# Altium PCB BUCK CONVERTER PCB.PcbDoc
Units mm, origin at the board's own origin, x right, y up, seen from the top; angles counter-clockwise.
Board outline 47.96 x 37.79 mm, 2 copper layers (Top Layer, Bottom Layer); 12 components, 5 nets, 32 pads, 13 vias.
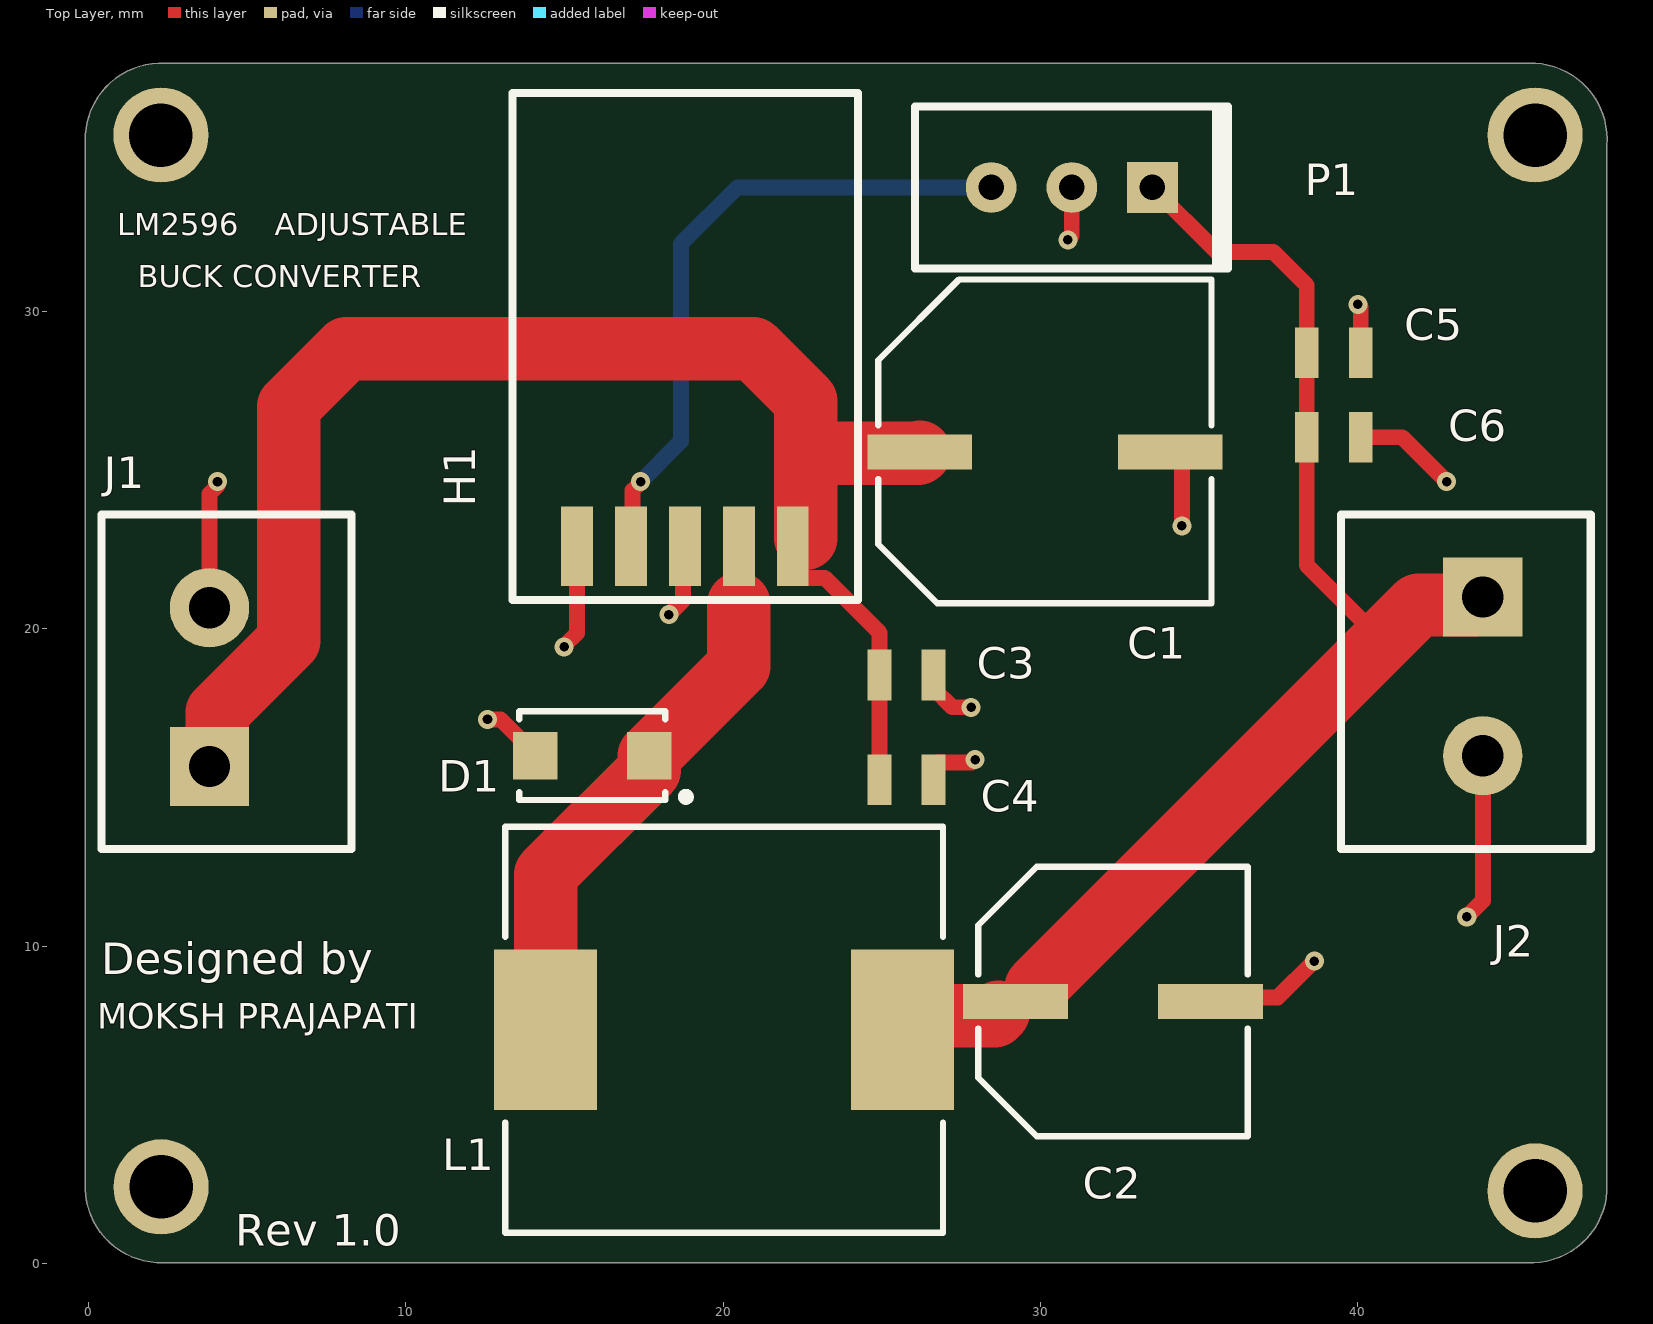
[diagram p0: Top Layer view]
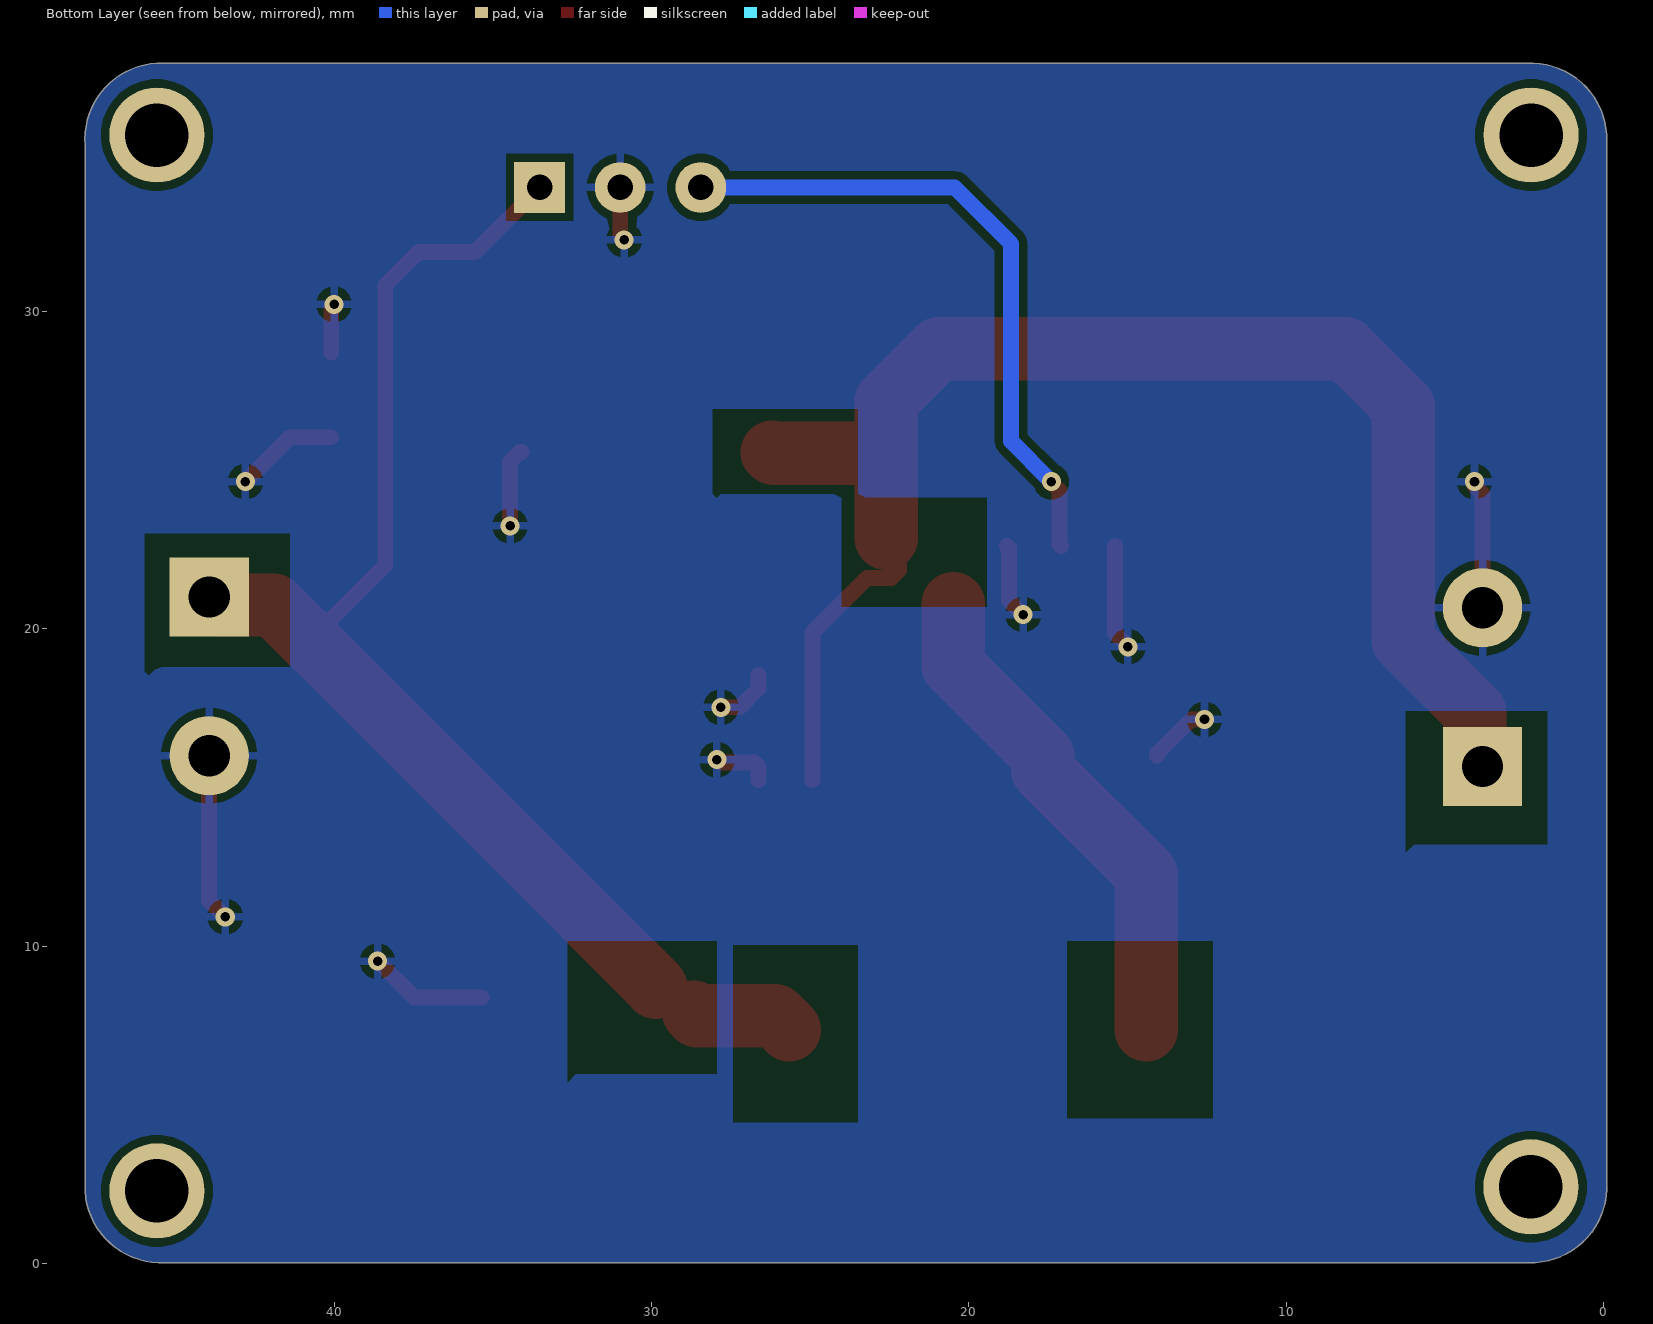
[diagram p1: Bottom Layer view, seen from below]
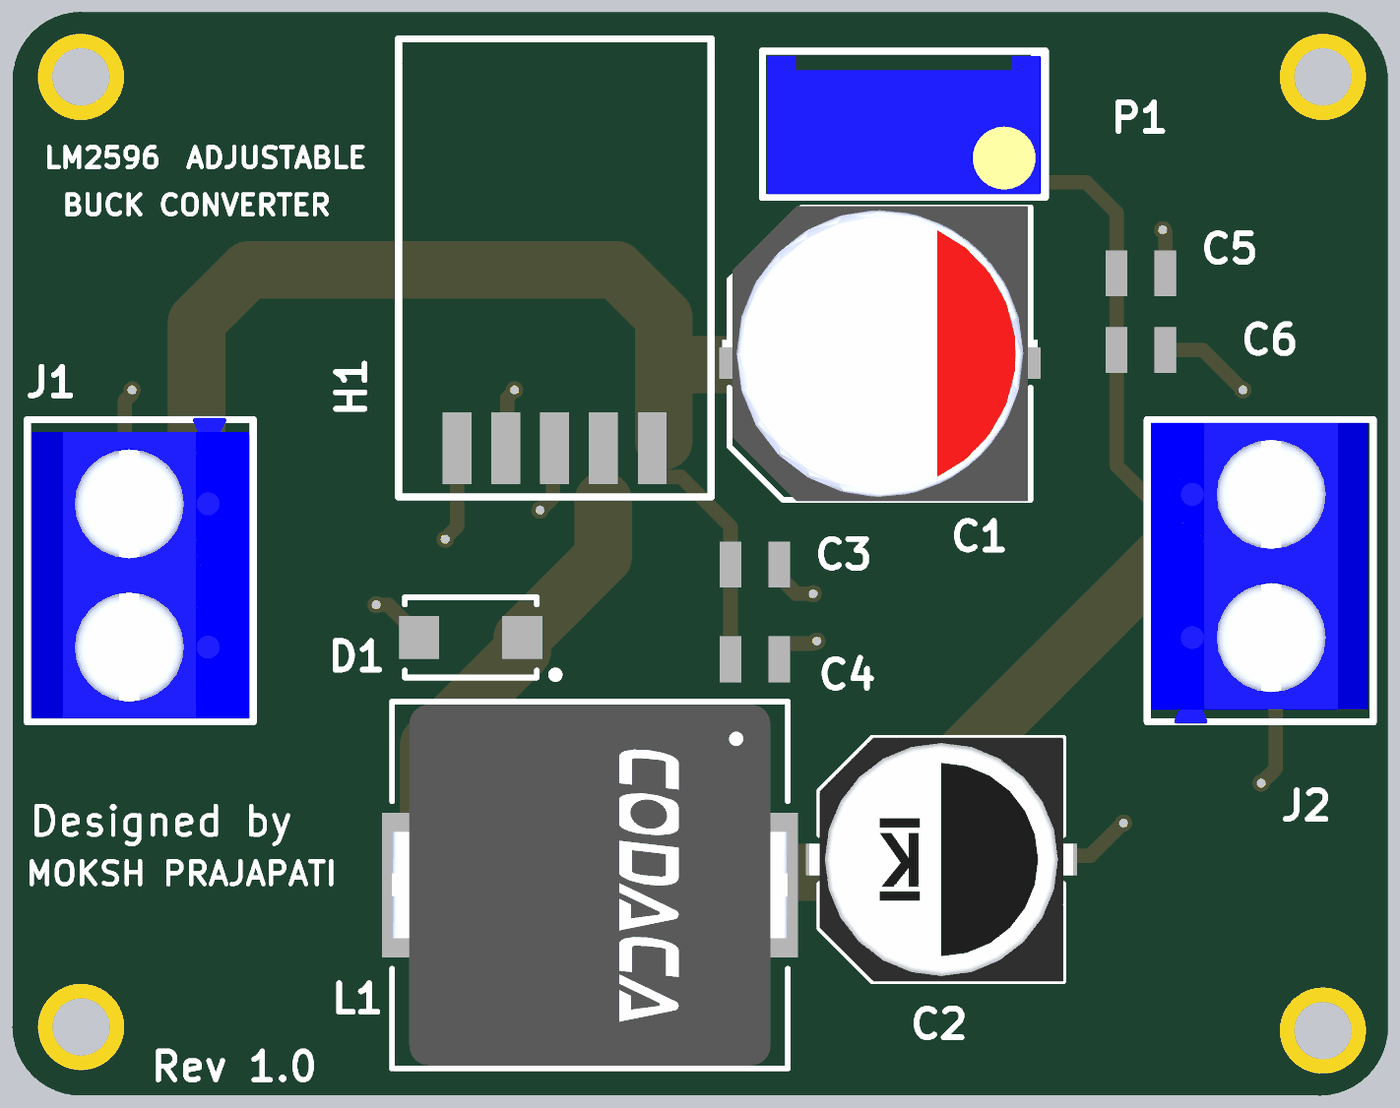
[diagram p2: 3D render of the assembled board from above, using the file's embedded part models]

## Layer stack, top to bottom
Top Solder: solder mask 0.0102, Solder Resist, Dk 3.5
Top Layer: signal copper 0.0356
Dielectric 1: dielectric 0.32, FR-4, Dk 4.8
Bottom Layer: signal copper 0.0356
Bottom Solder: solder mask 0.0102, Solder Resist, Dk 3.5

## Board outline
-0.1,2.543 ccw(c2.286,2.413) 2.153,0.027 2.159,0.027 45.336,0.027 ccw(c45.466,2.413) 47.852,2.28 47.852,2.286 47.852,35.303 ccw(c45.466,35.433) 47.856,35.433 ccw(c45.466,35.433) 45.599,37.819 45.593,37.819 2.416,37.819 ccw(c2.286,35.433) -0.1,35.566 -0.1,35.56

## Design rules (kind name [scope] priority, off if disabled: settings)
Clearance [All] p1: gap=0.254 ignorepadtopadclearanceinfootprint=FALSE
PolygonConnect [All] p1: connectstyle=Relief reliefconductorwidth=0.254 reliefentries=4 polygonreliefangle="90 Angle" airgapwidth=0.254
RoutingVias [All] p1: holewidth=0.3 width=0.6 viastyle="Through Hole" minholewidth=0.3 minwidth=0.6 maxholewidth=0.3 maxwidth=0.6
SilkToSilkClearance [All] p1: silktosilkclearance=0.1
SilkToSolderMaskClearance [IsPad] p1: minsilkscreentomaskgap=0.1 clearancetoexposedcopper=TRUE
SolderMaskExpansion [All] p1: expansion=0 istentingtop=FALSE
SupplyNets "Schematic Supply Nets_1" [InNet('VOUT')] p1: voltage=0.000
SupplyNets "Schematic Supply Nets_2" [InNet('VIN')] p2: voltage=0.000
SupplyNets "Schematic Supply Nets" [InNet('GND')] p3: voltage=0.000
Width [All] p1: maxlimit=2 minlimit=0.3 preferedwidth=0.5
28 further rules are at their usual default settings.

## Components (designator, comment, footprint, x,y, rotation, side; value= is the part's Value field where it differs from the comment)
C1 "100uF" "ELECTROLYTIC CAPACITOR" 29.972,25.908 r0 top
C2 "220uF" ELECROLITIC 32.285,8.255 r0 top
C3 "100nF" CAPACITOR0805 25.781,18.542 r0 top
C4 "1uF" CAPACITOR0805 25.781,15.24 r0 top
C5 "100nF" CAPACITOR0805 39.243,28.702 r0 top
C6 "1uF" CAPACITOR0805 39.243,26.035 r0 top
D1 "SS54" "SCHKOOTY DIODE" 15.875,16.002 r180 top
H1 "LM2596" TO263-5L 22.196,22.606 r270 top
J1 "1X2 HEADER" "CONNECTOR BLOCK2PIN" 3.81,18.161 r180 top
J2 "1X2 HEADER" "CONNECTOR BLOCK2PIN" 43.942,18.5 r0 top
L1 "47uH" INDUCTOR 20.029,7.366 r0 top
P1 "10K" POTENTIOMETER 30.988,33.909 r270 top

## Footprints (in the part's own frame and the unit in brackets; to place one, negate y for a bottom-side part, rotate by r counter-clockwise, add the part's x,y. Pads: shape width x height; smd on the part's side, far side on the other; paste and mask are expansions set on the pad)
CAPACITOR0805 [mm]
  rect 0.75x1.6 smd: 1(-0.85,0) 2(0.85,0)
  body extent -1.15,-0.77 1.15,0.77, height 0.6
"CONNECTOR BLOCK2PIN" [mm] "terminalbox 2pin"
  rect 2.5x2.5 hole 1.3 mask-2539.97: 1(0,2.5)
  round 2.5 hole 1.3 mask-2539.97: 2(0,-2.5)
  silkscreen extent -4.47,-5.44 3.4,5.1, body extent -4.36,-5.5 3.24,5, height 3.2
ELECROLITIC [mm] "A768KS227M1VLAE024"
  rect 3.3x1.1 smd: 1(-3.075,0) 2(3.075,0)
  silkscreen extent -4.25,-4.25 4.25,4.25, body extent -4.6,-4.25 4.6,4.25
"ELECTROLYTIC CAPACITOR" [mm] "A768MS107M1HLAE024.....100uF 50V Capacitor"
  rect 3.3x1.1 smd: 1(-3.78,-0.34) 2(4.12,-0.34)
  silkscreen extent -5.08,-5.1 5.42,5.1, body extent -5.33,-5.15 5.67,5.15
INDUCTOR [mm]
  rect 3.25x5.05 smd: 1(-5.625,0) 2(5.625,0)
  silkscreen extent -6.9,-6.4 6.9,6.4, body extent -6.9,-6.3 6.9,6.3
POTENTIOMETER [mm] "3PIN...3296W-1-103RLF"
  rect 1.6x1.6 hole 0.8 mask-2539.97: 1(0,2.54)
  round 1.6 hole 0.8 mask-2539.97: 2(0,0) 3(0,-2.54)
  silkscreen extent -2.55,-4.94 2.55,4.92, body extent -2.38,-4.77 2.45,4.76, height 6.72
"SCHKOOTY DIODE" [mm] "SMA/DO-214AC"
  rect 1.4x1.5 smd: 1(-1.8,0) 2(1.8,0)
  silkscreen extent -3.08,-1.4 2.3,1.42, body extent -2.3,-1.4 2.3,1.4, height 2.62
TO263-5L [mm] "LM2596S-ADJ-EV"
  rect 2.5x1 smd: 1(0,0) 2(0,-1.7) 3(0,-3.4) 4(0,-5.1) 5(0,-6.8)
  silkscreen extent -14.28,-8.84 1.7,2.06

## Part data
C1 C2: library part CAPACITOR, "POLERIZED"
C3 C4 C5 C6: library part CAPACITOR.., "UNPOLERIZED"
D1: library part "Schottky Diode"
H1: "TO263-5L"
J1 J2: library part "terminalblock 2 pin", Color=White, Contact Resistance=10mΩ, Current Rating=4A, Dielectric Material=Polyamide, Flammability Rating="UL94 V-0", Housing Color=Natural, Insulation Resistance=1GΩ, Manufacturer=Molex, Manufacturer Lifecycle Status=ACTIVE, Manufacturer Part Number=22-27-2021, Max Operating Temperature=75°C, Min Operating Temperature=0°C, Ratings=CSA, Supplier Part Number=WM4111-ND, Voltage Rating=500V, Voltage Rating (AC)=250V, Approvals="CSA, UL", Category="Headers and Wire Housings", China RoHS=Compliant, ComponentLink1Description=https://datasheet.octopart.com:443/22-27-2021-Molex-datasheet-81843831.pdf?src-supplier=Upverter, ComponentLink1URL=https://datasheet.octopart.com:443/22-27-2021-Molex-datasheet-81843831.pdf?src-supplier=Upverter, ComponentLink2Description=https://datasheet.octopart.com:443/22-27-2021-Molex-datasheet-10979409.pdf?src-supplier=Molex, ComponentLink2URL=https://datasheet.octopart.com:443/22-27-2021-Molex-datasheet-10979409.pdf?src-supplier=Molex, ComponentLink3Description=https://datasheet.octopart.com:443/02227-2021-Molex-datasheet-13784872.pdf?src-supplier=Molex, ComponentLink3URL=https://datasheet.octopart.com:443/02227-2021-Molex-datasheet-13784872.pdf?src-supplier=Molex, ComponentLink4Description=https://datasheet.octopart.com:443/22-27-2021-Molex-datasheet-5315839.pdf?src-supplier=Future+Electronics, ComponentLink4URL=https://datasheet.octopart.com:443/22-27-2021-Molex-datasheet-5315839.pdf?src-supplier=Future+Electronics, ComponentLink5Description=https://datasheet.octopart.com:443/22272021-Molex-datasheet-137316104.pdf?src-supplier=Future+Electronics, ComponentLink5URL=https://datasheet.octopart.com:443/22272021-Molex-datasheet-137316104.pdf?src-supplier=Future+Electronics, ComponentLink6Description=https://datasheet.octopart.com:443/22-27-2021-Molex-datasheet-193085717.pdf?src-supplier=JRH+Electronics, ComponentLink6URL=https://datasheet.octopart.com:443/22-27-2021-Molex-datasheet-193085717.pdf?src-supplier=JRH+Electronics, ComponentLink7Description=https://datasheet.octopart.com:443/22-27-2021-Molex-datasheet-154747145.pdf?src-supplier=Master+Electronics, ComponentLink7URL=https://datasheet.octopart.com:443/22-27-2021-Molex-datasheet-154747145.pdf?src-supplier=Master+Electronics, ComponentLink8Description=https://datasheet.octopart.com:443/22-27-2021-Molex-datasheet-101581847.pdf?src-supplier=Farnell, ComponentLink8URL=https://datasheet.octopart.com:443/22-27-2021-Molex-datasheet-101581847.pdf?src-supplier=Farnell, ComponentLink9Description=https://datasheet.octopart.com:443/02227-2021-Molex-datasheet-14711101.pdf?src-supplier=Farnell, ComponentLink9URL=https://datasheet.octopart.com:443/02227-2021-Molex-datasheet-14711101.pdf?src-supplier=Farnell, ComponentLink10Description=https://datasheet.octopart.com:443/22-27-2021-Molex-datasheet-506551.pdf?src-supplier=Farnell, ComponentLink10URL=https://datasheet.octopart.com:443/22-27-2021-Molex-datasheet-506551.pdf?src-supplier=Farnell, ComponentLink11Description=https://datasheet.octopart.com:443/22-27-2021-Molex-datasheet-21538535.pdf?src-supplier=Newark, ComponentLink11URL=https://datasheet.octopart.com:443/22-27-2021-Molex-datasheet-21538535.pdf?src-supplier=Newark, ComponentLink12Description=https://datasheet.octopart.com:443/22-27-2021-Molex-datasheet-38329585.pdf?src-supplier=Newark, ComponentLink12URL=https://datasheet.octopart.com:443/22-27-2021-Molex-datasheet-38329585.pdf?src-supplier=Newark, ComponentLink13Description=https://datasheet.octopart.com:443/22-27-2021-Molex-datasheet-33021744.pdf?src-supplier=Newark, ComponentLink13URL=https://datasheet.octopart.com:443/22-27-2021-Molex-datasheet-33021744.pdf?src-supplier=Newark, ComponentLink14Description=https://datasheet.octopart.com:443/22-27-2021-Molex-datasheet-33002331.pdf?src-supplier=Newark, ComponentLink14URL=https://datasheet.octopart.com:443/22-27-2021-Molex-datasheet-33002331.pdf?src-supplier=Newark, ComponentLink15Description=https://datasheet.octopart.com:443/02227-2021-Molex-datasheet-21206939.pdf?src-supplier=Newark, ComponentLink15URL=https://datasheet.octopart.com:443/02227-2021-Molex-datasheet-21206939.pdf?src-supplier=Newark, ComponentLink16Description=https://datasheet.octopart.com:443/22-27-2021-Molex-datasheet-604178.pdf?src-supplier=element14+APAC, ComponentLink16URL=https://datasheet.octopart.com:443/22-27-2021-Molex-datasheet-604178.pdf?src-supplier=element14+APAC, ComponentLink17Description=https://datasheet.octopart.com:443/0022272021-Molex-datasheet-164461543.pdf?src-supplier=Sager+Electronics, ComponentLink17URL=https://datasheet.octopart.com:443/0022272021-Molex-datasheet-164461543.pdf?src-supplier=Sager+Electronics, ComponentLink18Description=https://datasheet.octopart.com:443/22-27-2021-Molex-datasheet-158567618.pdf?src-supplier=RS+(Formerly+Allied+Electronics), ComponentLink18URL=https://datasheet.octopart.com:443/22-27-2021-Molex-datasheet-158567618.pdf?src-supplier=RS+(Formerly+Allied+Electronics), ComponentLink19Description=https://datasheet.octopart.com:443/22-27-2021-Molex-datasheet-140181058.pdf?src-supplier=RS+(Formerly+Allied+Electronics), ComponentLink19URL=https://datasheet.octopart.com:443/22-27-2021-Molex-datasheet-140181058.pdf?src-supplier=RS+(Formerly+Allied+Electronics), ComponentLink20Description=https://datasheet.octopart.com:443/22-27-2021-Molex-datasheet-120145351.pdf?src-supplier=RS+(Formerly+Allied+Electronics), ComponentLink20URL=https://datasheet.octopart.com:443/22-27-2021-Molex-datasheet-120145351.pdf?src-supplier=RS+(Formerly+Allied+Electronics), ComponentLink21Description=https://datasheet.octopart.com:443/22-27-2021-Molex-datasheet-9995492.pdf?src-supplier=RS+(Formerly+Allied+Electronics), ComponentLink21URL=https://datasheet.octopart.com:443/22-27-2021-Molex-datasheet-9995492.pdf?src-supplier=RS+(Formerly+Allied+Electronics), ComponentLink22Description=https://datasheet.octopart.com:443/22-27-2021-Molex-datasheet-155977274.pdf?src-supplier=SOS+electronic, ComponentLink22URL=https://datasheet.octopart.com:443/22-27-2021-Molex-datasheet-155977274.pdf?src-supplier=SOS+electronic, ComponentLink23Description=https://datasheet.octopart.com:443/22-27-2021-Molex-datasheet-62103479.pdf?src-supplier=Electro+Sonic, ComponentLink23URL=https://datasheet.octopart.com:443/22-27-2021-Molex-datasheet-62103479.pdf?src-supplier=Electro+Sonic, ComponentLink24Description=https://datasheet.octopart.com:443/22-27-2021-Molex-datasheet-37168867.pdf?src-supplier=Electro+Sonic, ComponentLink24URL=https://datasheet.octopart.com:443/22-27-2021-Molex-datasheet-37168867.pdf?src-supplier=Electro+Sonic, ComponentLink25Description=https://datasheet.octopart.com:443/22-27-2021-Molex-datasheet-151821780.pdf?src-supplier=Toby+Electronics, ComponentLink25URL=https://datasheet.octopart.com:443/22-27-2021-Molex-datasheet-151821780.pdf?src-supplier=Toby+Electronics, ComponentLink26Description=https://datasheet.octopart.com:443/22-27-2021-Molex-datasheet-124775.pdf?src-supplier=DigiKey, ComponentLink26URL=https://datasheet.octopart.com:443/22-27-2021-Molex-datasheet-124775.pdf?src-supplier=DigiKey, ComponentLink27Description=https://datasheet.octopart.com:443/22-27-2021-Molex-datasheet-7627818.pdf?src-supplier=Jameco, ComponentLink27URL=https://datasheet.octopart.com:443/22-27-2021-Molex-datasheet-7627818.pdf?src-supplier=Jameco, ComponentLink28Description=https://datasheet.octopart.com:443/22-27-2021-Molex-datasheet-17586671.pdf?src-supplier=TME, ComponentLink28URL=https://datasheet.octopart.com:443/22-27-2021-Molex-datasheet-17586671.pdf?src-supplier=TME, ComponentLink29Description=http://sigma.octopart.com:80/16297726/rohs_statement/Molex-02227-2021.pdf?src-supplier=Compliance+Statements, ComponentLink29URL=http://sigma.octopart.com:80/16297726/rohs_statement/Molex-02227-2021.pdf?src-supplier=Compliance+Statements, ComponentLink30Description=http://sigma.octopart.com:80/reach_statement/Molex-company-74.pdf?src-supplier=Compliance+Statements, ComponentLink30URL=http://sigma.octopart.com:80/reach_statement/Molex-company-74.pdf?src-supplier=Compliance+Statements, ComponentLink31Description=http://sigma.octopart.com:80/rohs_statement/Molex-company-73.pdf?src-supplier=Compliance+Statements, ComponentLink31URL=http://sigma.octopart.com:80/rohs_statement/Molex-company-73.pdf?src-supplier=Compliance+Statements, ComponentLink32Description=http://sigma.octopart.com:80/conflict_mineral_statement/Molex-company-72.pdf?src-supplier=Compliance+Statements, ComponentLink32URL=http://sigma.octopart.com:80/conflict_mineral_statement/Molex-company-72.pdf?src-supplier=Compliance+Statements, Contact Gender=Male, Contact Material=Brass, Contact Plating=Tin, Country of Origin=TH, Depth=5.8mm, Export Control Classification Number (ECCN) Code=EAR99, Gender=Male, Harmonized Tariff Schedule (HTS) Code=8536.69.40.40, Height=12.05mm, Housing Material=Nylon, Introduction Date=1994-12-01, Lead Free="Lead Free", Lead Pitch=2.54mm, Length=10.16mm, Lifecycle Status=Production, Material=Nylon, Max Current Rating=4A, Mounting Technology="Through Hole", Number of Circuits=2, Number of Contacts=2, Number of Positions=2, Number of Rows=1, Orientation=Vertical, Pins=2, Pitch=2.54mm, Plating=Tin, Plating Thickness=2.54µm, Pricing="1=0.21, 10=0.182, 100=0.1546, 500=0.13798, 2850=0.12202, 5700=0.11619, 11400=0.11065 (USD)", Radiation Hardening=No, REACH SVHC=Yes, RoHS=Compliant, Schedule B="8536694040, 8536694040|8536694040|8536694040|8536694040|8536694040|8536694040|8536694040|8536694040|8536694040|8536694040|8536694040|8536694040|8536694040|8536694040|8536694040|8536694040|8536694040|8536694040|8536694040|8536694040|8536694040|8536694040|8536694040|85", Stock=142263, Supplier=DigiKey, Terminal Pitch=2.54mm, Termination=Solder, Voltage Rating (DC)=250V, Working Voltage=250V
L1: library part INDUCTOR
P1: library part POTENTIOMETER

## Free pads (board coordinates)
  round 3 hole 2: 1(2.28,35.56) 1(2.286,2.413) 1(45.59,2.286) 1(45.59,35.56)

## Via types
v1: diameter 0.6, hole 0.3, Top Layer to Bottom Layer, tented both sides, 13 vias

## Nets (pads, with @x,y where several pads share a name; then routed paths per layer and width w, separated by ;. In a path a pad name is that pad's centre, name@x,y a point inside that pad or via, vN(x,y) a via of type N, cw(c..) or ccw(c..) an arc to the next point about the centre after c; other vN are vias at no path point)
GND: C1.2 C2.2 C3.2 C4.2 C5.2 C6.2 D1.2 H1.3 H1.5 J1.2 J2.2 P1.2 | length 32.2
  Top Layer w0.5: J1.2 3.81,24.257 v1@4.064,24.511 ; v1(12.573,17.145) 12.982,17.145 14.075,16.052 D1.2 ; v1(14.986,19.431) 14.986,19.458 15.396,19.868 H1.5 ; v1(18.288,20.447) 18.74,20.899 18.74,22.55 H1.3 ; C4.2 26.631,15.665 26.756,15.79 27.828,15.79 27.913,15.875 v1(27.94,15.875) ; C3.2 26.631,18.117 27.222,17.526 v1(27.813,17.526) ; v1(30.861,32.258) 30.988,32.385 P1.2 ; C1.2 34.159,25.568 34.459,25.268 v1(34.459,23.241) ; C2.2@35.36,8.382 37.476,8.382 38.619,9.525 v1(38.635,9.525) ; v1(40.005,30.226) 40.093,30.138 C5.2 ; C6.2 41.402,26.035 v1(42.799,24.638) ; v1(43.434,10.922) 43.942,11.43 43.942,14.732
  other v1: 4.064,24.638
NetD1_1: D1.1 H1.2 L1.1 | length 15.9
  Top Layer w2: L1.1 14.404,12.266 17.675,15.537 D1.1 20.496,18.823 20.496,20.783
NetH1_4: H1.4 P1.3 | length 20.7
  Top Layer w0.5: H1.4 17.145,22.655 17.145,24.357 17.399,24.611 v1(17.399,24.638)
  Bottom Layer w0.5: v1(17.399,24.638) 18.669,25.908 18.669,32.131 20.447,33.909 P1.3
VIN: C1.1 C3.1 C4.1 H1.1 J1.1 | length 47
  Top Layer w0.5: H1.1 22.196,21.856 22.446,21.606 23.196,21.606 24.931,19.871 C3.1 C4.1
  Top Layer w2: J1.1 4.06,15.911 4.06,17.37 6.314,19.624 6.314,27.015 8.128,28.829 20.955,28.829 22.606,27.178 22.606,25.527 ; H1.1@22.606,22.856 22.606,25.527 ; C1.1 26.151,25.527 22.606,25.527
VOUT: C2.1 C5.1 C6.1 J2.1 L1.2 P1.1 | length 40.3
  Top Layer w0.5: P1.1 35.56,31.877 37.338,31.877 38.393,30.822 C5.1 C6.1 38.393,22.002 40.46,19.935
  Top Layer w2: L1.2 26.098,7.81 28.56,7.81 C2.1@28.668,7.919 ; C2.1@29.86,8.705 41.905,20.75 43.692,20.75 J2.1

## Polygon pours and split planes (outlines as drawn)
GND on Bottom Layer "GND_L02_P000" (solid, pour order 0): -0.1,2.543 ccw(c2.286,2.413) 2.153,0.027 2.159,0.027 45.336,0.027 ccw(c45.466,2.413) 47.852,2.28 47.852,2.286 47.852,35.303 ccw(c45.466,35.433) 47.856,35.433 ccw(c45.466,35.433) 45.599,37.819 45.593,37.819 2.416,37.819 ccw(c2.286,35.433) -0.1,35.566 -0.1,35.56

## Other copper
Multi-Layer:
  pour cut-out: 27.94,10.16 32.639,10.16 32.639,5.715 32.385,5.969 27.94,5.969
  pour cut-out: 41.402,22.987 45.974,22.987 45.974,18.669 45.847,18.542 45.593,18.796 41.402,18.796
  pour cut-out: 23.495,10.033 27.432,10.033 27.432,4.445 23.495,4.445
  pour cut-out: 12.319,10.16 16.891,10.16 16.891,4.572 12.319,4.572
  pour cut-out: 23.495,26.924 28.067,26.924 28.067,24.257 27.94,24.13 27.813,24.257 23.495,24.257
  pour cut-out: 19.431,24.13 24.003,24.13 24.003,20.701 23.114,20.701 19.431,20.701
  pour cut-out: 1.778,17.399 6.223,17.399 6.223,12.954 5.969,13.208 1.778,13.208

## Silkscreen, mask and mechanical layers (free items; w line width, h text height)
Top Overlay:
  text "LM2596" at 0.912,32.408 h0.7
  text "ADJUSTABLE" at 5.865,32.408 h0.7
  text "BUCK CONVERTER" at 1.547,30.757 h0.7
  text "Designed by" at 0.404,9.119 h1
  text "MOKSH PRAJAPATI" at 0.277,7.389 h0.8
  text "Rev 1.0" at 4.625,0.561 h1
Mechanical 1:
  lines w0.2: 45.339,0.127 ccw(c45.466,2.413) 47.752,2.286 47.752,35.56 ; 45.593,0.127 2.159,0.127 cw(c2.286,2.413) 0,2.54 0,35.56 cw(c2.286,35.433) 2.413,37.719 45.593,37.719 cw(c45.466,35.433) 47.752,35.306